# Altium PCB 2014_carte_alim.PcbDoc
Units mil, origin at the board's own origin, x right, y up, seen from the top; angles counter-clockwise.
Board outline 3228.35 x 1574.8 mil, 4 copper layers (1-TOP, 2-GND, 3-SIGNAL, 4-BOT); 35 components, 13 nets, 190 pads, 41 vias.
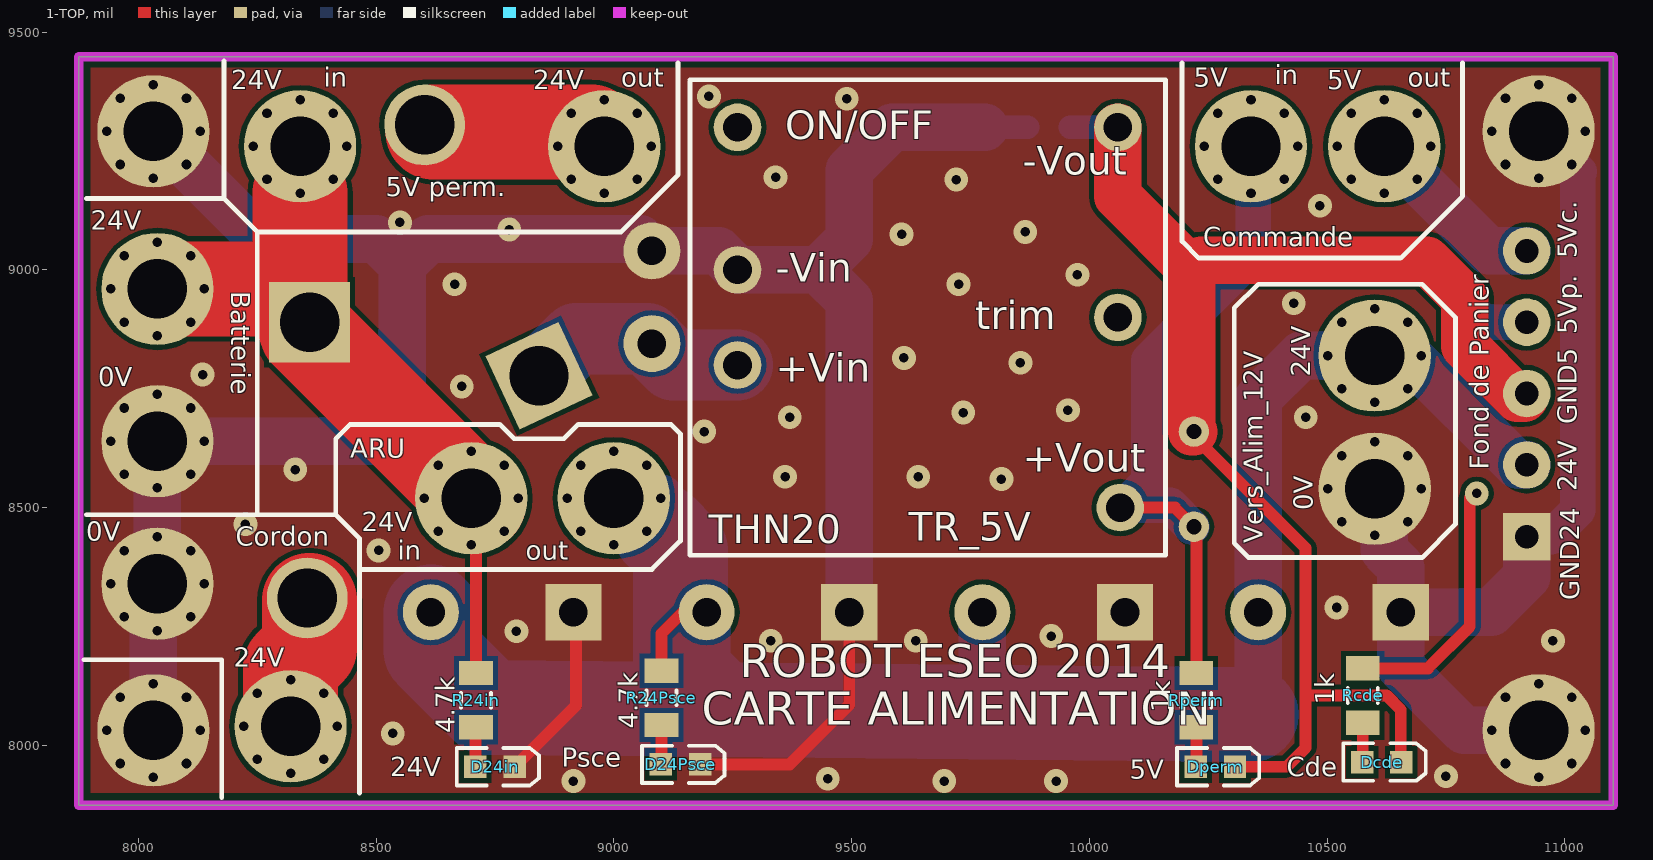
[diagram p0: 1-TOP view]
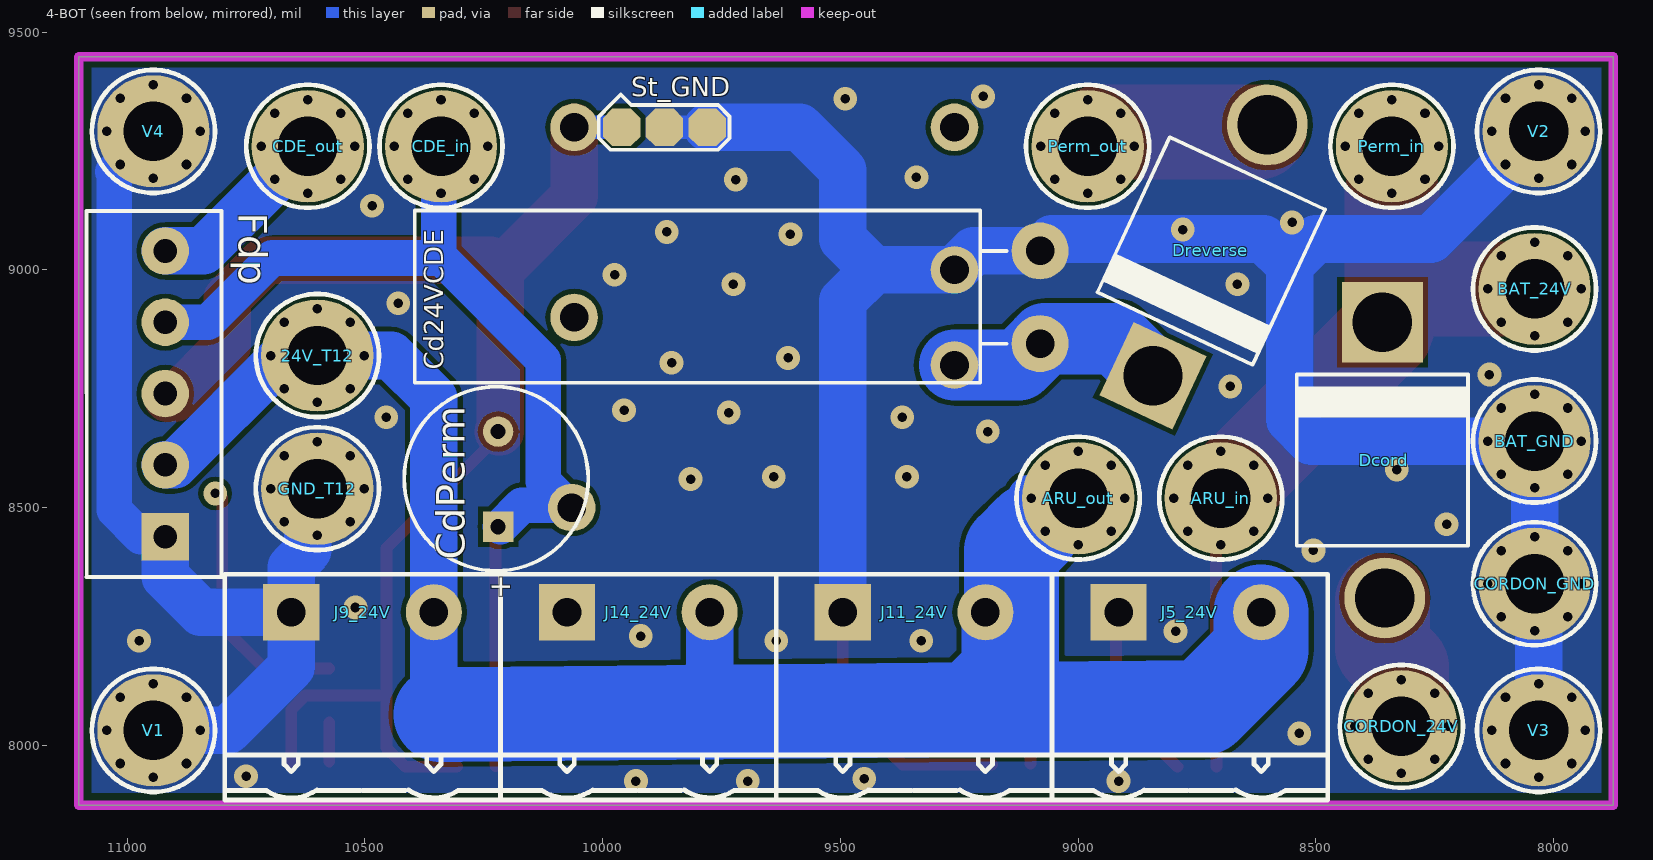
[diagram p1: 4-BOT view, seen from below]
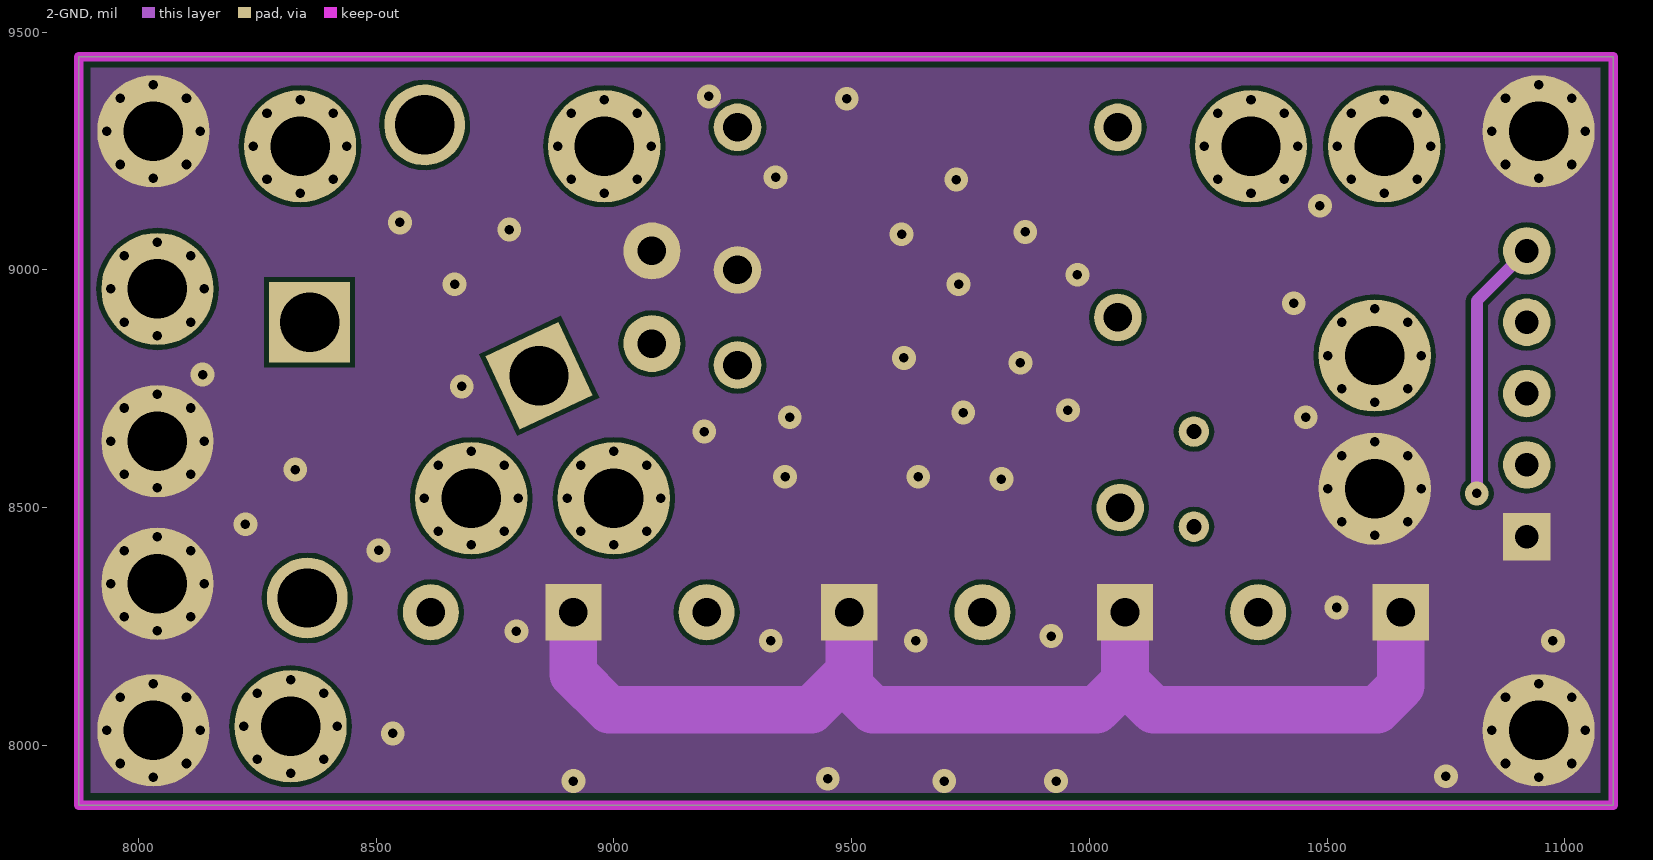
[diagram p2: 2-GND]
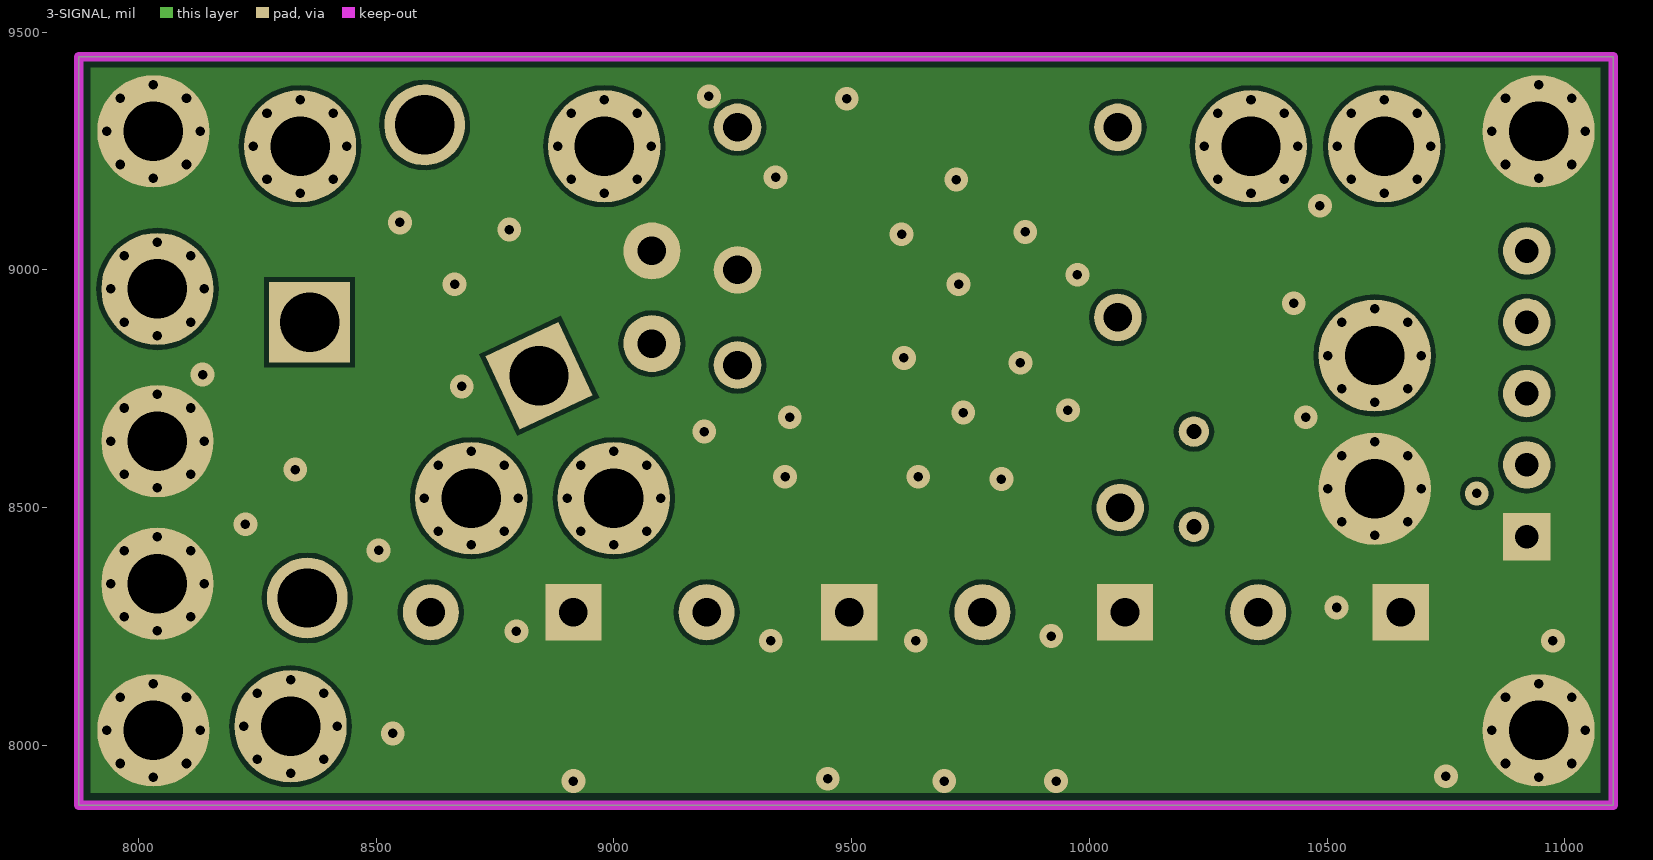
[diagram p3: 3-SIGNAL]
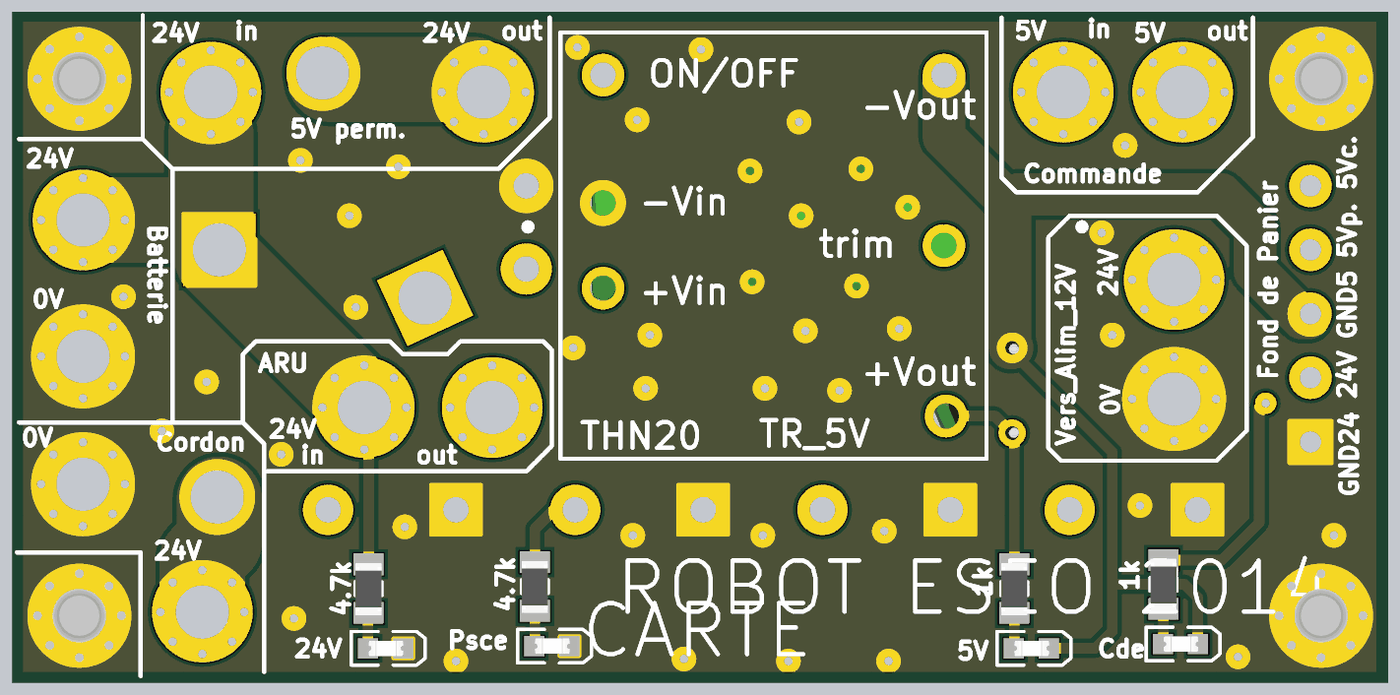
[diagram p4: 3D render of the assembled board from above, using the file's embedded part models]

## Layer stack, top to bottom
1-TOP: signal copper 1.4
Dielectric: core 12.6, FR-4, Dk 4.8
2-GND: signal copper 1.4
Dielectric: prepreg 12.6, FR-4, Dk 4.8
3-SIGNAL: signal copper 1.4
Dielectric: core 12.6, FR-4, Dk 4.8
4-BOT: signal copper 1.4

## Board outline
7874.02,7874.02 11102.36,7874.02 11102.36,9448.82 7874.02,9448.82

## Design rules (kind name [scope] priority, off if disabled: settings)
Clearance [All] p1: gap=10
FabricationTestpoint [(IsPad And (OnTopLayer Or OnBottomLayer))] p1: side=3 testpointundercomponent=TRUE minsize=40 maxsize=100 preferedsize=60 minholesize=0 maxholesize=40 preferedholesize=32 testpointgrid=1 allowsidetop=TRUE allowsidebottom=TRUE usegrid=TRUE gridtolerance=0.01
HoleSize [All] p1: absolutevalues=TRUE maxlimit=200 minlimit=1 maxpercent=80.000 minpercent=20.000
PlaneConnect [All] p1: planeconnectstyle=Direct reliefexpansion=20 reliefentries=4 reliefconductorwidth=10 reliefairgap=10
PolygonConnect [All] p1: connectstyle=Direct reliefconductorwidth=10 reliefentries=4 polygonreliefangle="90 Angle"
RoomDefinition 2014_carte_alim [InComponentClass('2014_carte_alim')] p1: confinementstyle=ConfineIn formatcopy=TRUE lockcomponents=FALSE outline 11870,7925 12895,7925 12895,9055 11870,9055
RoutingVias [All] p1: holewidth=28 width=50 viastyle="Through Hole" minholewidth=28 minwidth=50 maxholewidth=28 maxwidth=50
SilkscreenOverComponentPads [All] p1: minsilkscreentomaskgap=10
SolderMaskExpansion [All] p1: expansion=4
Width [All] p1: maxlimit=200 minlimit=10 preferedwidth=15
24 further rules are at their usual default settings.

## Components (designator, comment, footprint, x,y, rotation, side; value= is the part's Value field where it differs from the comment)
24V_T12 "Pad_M3" M3x6mm 10600,8820 r180 bottom
ARU_in "Pad_M3" M3x6mm 8700,8520 r180 bottom
ARU_out "Pad_M3" M3x6mm 9000,8520 r270 bottom
BAT_24V "Pad_M3" M3x6mm 8040,8960 r0 bottom
BAT_GND "Pad_M3" M3x6mm 8040,8640 r0 bottom
Cd24VCDE "1000uF" RESISTANCE_5W 9080,8940 r0 bottom
CDE_in "Pad_M3" M3x6mm 10340,9260 r180 bottom
CDE_out "Pad_M3" M3x6mm 10620,9260 r270 bottom
CdPerm "100uF" CONDENSATEUR_POLARISE_ELECTROLYTIQUE_RADIAL_5.08/8.9 10220,8460 r90 bottom
CORDON_24V "Pad_M3" M3x6mm 8320,8040 r0 bottom
CORDON_GND "Pad_M3" M3x6mm 8040,8340 r0 bottom
D24in "LED" LED_0805 8750,7955 r0 top
D24Psce "LED" LED_0805 9140,7960 r0 top
Dcde "LED" LED_0805 10615,7965 r0 top
Dcord "Diode" DIO10.46-5.3x2.8 8360,8600 r90 bottom
Dperm "LED" LED_0805 10265,7955 r0 top
Dreverse "Diode 1N4001" DIO10.46-5.3x2.8 8720,9040 r295 bottom (schematic designator Dcord)
Fdp "BORNIER_5V_3.81MM" BORNIER_5V_3.81MM 10920,8440 r90 bottom
GND_T12 "Pad_M3" M3x6mm 10600,8540 r180 bottom
J5_24V "0 - 24V" BORNIER2_FEM_COUDE 8915,8280 r180 bottom
J9_24V "0 - 24V" BORNIER2_FEM_COUDE 10655,8280 r180 bottom
J11_24V "0 - 24V" BORNIER2_FEM_COUDE 9495,8280 r180 bottom
J14_24V "0 - 24V" BORNIER2_FEM_COUDE 10075,8280 r180 bottom
Perm_in "Pad_M3" M3x6mm 8340,9260 r180 bottom
Perm_out "Pad_M3" M3x6mm 8980,9260 r180 bottom
R24in "4.7k" R1206_N 8710,8095 r270 top
R24Psce "4.7k" R1206_N 9100,8100 r270 top
Rcde "1k" R1206_N 10575,8105 r270 top
Rperm "1k" R1206_N 10225,8095 r270 top
St_GND "Goutte Strap_3" "Goutte Strap_3" 9960,9300 r180 bottom
TR_5V "TRACO THN 20-4811Wi" TRACO_THN20 9160,9400 r0 top
V1 "Pad_M3" M3x6mm 10944.88,8031.5 r180 bottom locked
V2 "Pad_M3" M3x6mm 8031.5,9291.34 r180 bottom locked
V3 "Pad_M3" M3x6mm 8031.5,8031.5 r180 bottom locked
V4 "Pad_M3" M3x6mm 10944.88,9291.34 r180 bottom locked

## Footprints (in the part's own frame and the unit in brackets; to place one, negate y for a bottom-side part, rotate by r counter-clockwise, add the part's x,y. Pads: shape width x height; smd on the part's side, far side on the other; paste and mask are expansions set on the pad)
BORNIER2_FEM_COUDE [mm] "Connector; Header; 2 Position; Right Angle; Female; Pin Spacing=5.08mm Green"
  rect 3x3 hole 1.524: 1(0,0)
  round 3 hole 1.524: 2(7.62,0)
  silkscreen extent -3.56,-10.03 11.18,2.03
BORNIER_5V_3.81MM [mil]
  rect 100x100 hole 50: 1(-1,0)
  round 100 hole 50: 2(150,0) 3(300,0) 4(450,0) 5(600,0)
  silkscreen extent -86,-118 684,166
CONDENSATEUR_POLARISE_ELECTROLYTIQUE_RADIAL_5.08/8.9 [mil] "CONDENSATEUR_POLARISE_ELECTROLYTIQUE_RADIAL ; DIAMETRE : 8.9mm ; ESPACEMENT BROCHES : 5.08mm"
  rect 64x64 / inner round 64 / far side round 64 hole 32: 1(0,0)
  round 64 hole 32: 2(200,0)
  silkscreen extent -93,-190 294,197, body extent -93,-188 291,196, height 485
DIO10.46-5.3x2.8 [mil] "Diode, Axial; Body 5.2 x 2.7 mm (LxDia. max), Lead Dia. 0.86 mm (max)"
  round 170 hole 125: 1(-290,-5)
  rect 170x170 hole 125: 2(290,0)
  silkscreen extent -180,-180 180,180
"Goutte Strap_3" [mm] "3 Pads CMS Goutte Strap"
  oct 2x2 smd: 1(0,0) 2(2.286,0) 3(4.572,0)
  silkscreen extent -1.22,-1.19 5.77,1.75
LED_0805 [mm] "SM LED; 2 Flat Leads"
  rect 1.2x1.2 smd: 1(-1.05,0) 2(1.05,0)
  silkscreen extent -2.05,-1 2.35,1, body extent -1.05,-0.64 1.06,0.64, height 1.2
M3x6mm [mm] "Vis M3 X 6mm _TORX_Tête 6mm"
  round 0.8 hole 0.508: 1(-2.5,0) 1(-1.768,-1.768) 1(-1.768,1.768) 1(0,-2.5) 1(0,2.5) 1(1.768,-1.768) 1(1.768,1.768) 1(2.5,0)
  round 6 hole 3.175: 1(0,0)
  silkscreen extent -3.29,-3.28 3.29,3.28
R1206_N [mm] "Chip Resistor, Body 3.2x1.6mm, IPC Medium Density"
  rect 1.3x1.8 smd: 1(-1.45,0) 2(1.45,0)
  silkscreen extent -0.4,-0.8 0.4,0.8, body extent -1.68,-0.87 1.68,0.87, height 0.71
RESISTANCE_5W [mil] "RESISTANCE 5W ; DIAMETRE : 8.5mm ; LONGUEUR : 26mm ; PAS : 2mm"
  round 120 hole 60: 1(0,95) 2(0,-100)
  silkscreen extent 70,-185 1315,177, body extent -12,-175 1320,167, height 368
TRACO_THN20 [mil] "THN20"
  round 100 hole 60: 1(100,-600) 2(100,-400) 3(905,-900) 4(900,-500) 5(900,-100) 6(100,-100)
  silkscreen extent 0,-1000 1000,0, body extent -2,-1001 1001,0, height 390

## Part data
24V_T12 ARU_in ARU_out BAT_24V BAT_GND CDE_in CDE_out CORDON_24V CORDON_GND GND_T12 Perm_in Perm_out V1 V2 V3 V4: library part "Vis M3 X 6mm _TORX_Tête 6mm", "Vis M3 X 6mm _TORX_Tête 6mm"
Cd24VCDE CdPerm: library part "Condensateur Polarise Traversant", "Polarized Capacitor"
D24in D24Psce Dcde Dperm: "Typical LED"
Dcord: library part "Diode 1N4001", "1 Amp General Purpose Rectifier"
Dreverse: "1 Amp General Purpose Rectifier"
J5_24V J9_24V J11_24V J14_24V: library part BORNIER2, "Terminal blocks, 2 pins, pitch=5mm"
R24in R24Psce Rcde Rperm: library part Resistor, "Resistor"
TR_5V: "Traco 20W 24V to 5V*4A"

## Via types
v1: diameter 50, hole 20, 1-TOP to 4-BOT, 41 vias

## Nets (pads, with @x,y where several pads share a name; then routed paths per layer and width w, separated by ;. In a path a pad name is that pad's centre, name@x,y a point inside that pad or via, vN(x,y) a via of type N, cw(c..) or ccw(c..) an arc to the next point about the centre after c; other vN are vias at no path point)
5VCDE: CDE_out.1 Fdp.5 Rcde.1 | length 1588.6
  1-TOP w25: Rcde.1 10712.09,8162.09 10800,8250 10800,8520 v1@10810,8530 ; CDE_out.1@10620,9260 CDE_out.1@10689.6,9190.4
  2-GND w25: v1(10815,8530) 10815,8935 Fdp.5
  4-BOT w100: CDE_out.1@10620,9260 10689.6,9190.4 10840,9040 Fdp.5
5VPERM: CDE_in.1 CdPerm.1 Fdp.4 Rperm.1 TR_5V.3 | length 2142.9
  1-TOP w25: TR_5V.3 10180,8500 CdPerm.1 10225,8455 Rperm.1
  2-GND w25: CDE_in.1@10340,9255 CDE_in.1@10340,9260
  4-BOT w25: CDE_in.1@10340,9260 CDE_in.1@10345,9255
  4-BOT w75: CdPerm.1@10215,8460 10170,8505 10075,8505 10125,8555 10125,8810 10340,9025 ; CDE_in.1@10345,9255 10345,9025 10695,9025 10830,8890 Fdp.4
24VCORDON: CORDON_24V.1 Dcord.1 | length 281.6
  1-TOP w200: CORDON_24V.1@8320,8040 8320,8165 8360,8205 Dcord.1@8360,8305
24VIN: ARU_in.1 BAT_24V.1 Dcord.2 Perm_in.1 R24in.1 | length 1543.9
  1-TOP w25: ARU_in.1@8700,8520 8700,8421.57 8710,8411.57 R24in.1
  1-TOP w100: BAT_24V.1@8030,8960 BAT_24V.1@8040,8960 ; Perm_in.1@8340,9161.57 Perm_in.1@8340,9260
  1-TOP w200: BAT_24V.1@8030,8960 Dcord.2@8290,8960 ; Perm_in.1@8340,9161.57 8340,8910 8355,8870 ARU_in.1@8715,8510
24VPERM: Dreverse.1 Perm_out.1 | length 396.6
  1-TOP w100: Perm_out.1@8935.06,9304.94 Perm_out.1@8980,9260
  1-TOP w200: Dreverse.1@8620,9290 Perm_out.1@8953.09,9290
24VPSCE: 24V_T12.1 ARU_out.1 Fdp.2 J5_24V.2 J9_24V.2 J11_24V.2 J14_24V.2 R24Psce.1 | length 4527.3
  1-TOP w25: R24Psce.1 9100,8235 9145,8280 J11_24V.2
  4-BOT w100: ARU_out.1@9000,8520 9098.43,8520 9098.43,8450.4 ; 9140,8120 9195,8175 ; J11_24V.2 9195,8175 ; 9290,8080 9195,8175 ; 9705,8080 9775,8150 ; J14_24V.2 9775,8150 ; 9865,8060 9855.47,8069.53 9775,8150 ; 10300,8060 10305.32,8065.32 10355,8115 J9_24V.2 10355,8730 10445,8820 24V_T12.1@10521.57,8820 ; 24V_T12.1@10620,8820 10670,8820 10900,8590 Fdp.2
  4-BOT w200: J5_24V.2 8615,8200 8735,8080 9098.05,8076.61 9855.47,8069.53 10305.32,8065.32 10340,8065 ; 9098.43,8450.4 9140,8408.83 9140,8120
GND_5: CdPerm.2 Dcde.2 Dperm.2 Fdp.3 St_GND.1 TR_5V.5 | length 2936.2
  1-TOP w25: CdPerm.2 10220,8650 10455,8415 10455,8105 ; Dperm.2 10415,7955 10455,7995 10455,8105 ; Dcde.2@10655,7965 10655,8075 10625,8105 10455,8105
  1-TOP w100: TR_5V.5 10060,9155 10215,9000 ; CdPerm.2 10215,8660 10215,9000 ; Fdp.3@10915,8730 10900,8730 10790,8840 10790,8940 10710,9020 10235,9020 10215,9000
  4-BOT w50: St_GND.1 TR_5V.5@10050,9300
GND_24: BAT_GND.1 Cd24VCDE.2 CORDON_GND.1 D24in.2 D24Psce.2 Fdp.1 GND_T12.1 J5_24V.1 J9_24V.1 J11_24V.1 J14_24V.1 St_GND.2 St_GND.3 TR_5V.2 V1.1 V2.1 V3.1 V4.1 | length 9758.3
  1-TOP w25: D24in.2 8920,8083.66 8920,8275 J5_24V.1 ; D24Psce.2 9370,7960 9495,8085 J11_24V.1
  2-GND w100: J5_24V.1 8915,8150 8990,8075 9415,8075 9495,8155 ; J11_24V.1 9495,8155 ; J14_24V.1 10075,8135 ; J9_24V.1 10655,8125 10605,8075 10135,8075 10075,8135 ; 9495,8155 9495,8125 9545,8075 10015,8075 10075,8135
  4-BOT w50: St_GND.3 St_GND.2 ; V4.1@10944.88,9291.34 V4.1@11014.48,9221.74
  4-BOT w75: Fdp.1 10971.36,8439 11027.5,8495.14 V4.1@11027.5,9208.72 ; V4.1@11014.48,9221.74 V4.1@11027.5,9208.72 ; 11030,9206.22 V4.1@11027.5,9208.72
  4-BOT w100: V3.1@8031.5,8031.5 8031.5,8129.92 CORDON_GND.1@8031.5,8241.57 ; V2.1@8031.5,9291.34 8101.09,9221.74 8257.83,9065 8500,9065 8555,9010 ; CORDON_GND.1@8040,8340 8040,8438.43 BAT_GND.1@8040,8541.57 ; BAT_GND.1@8040,8640 8138.43,8640 8510,8640 8555,8685 8555,9010 ; 9400,9000 TR_5V.2 ; J11_24V.1 9495,8935 9430,9000 ; St_GND.3 9585,9300 9495,9210 9495,9065 9430,9000 ; GND_T12.1@10620,8540 10620,8441.57 10620,8410 10655,8375 J9_24V.1 10845,8280 10920,8355 Fdp.1 ; J9_24V.1@10655,8265 10655,8165 10788.5,8031.5 V1.1@10846.46,8031.5 ; 8555,9010 8610,9065 9055,9065 Cd24VCDE.2 9220,9040 TR_5V.2 ; TR_5V.2 9430,9000
  other v1: 8915,7925 9695,7925 9930,7925 9450,7930 10750,7935 8535,8025 9330,8220 9635,8220 10975,8220 9920,8230 8795,8240 10520,8290 8505,8410 8225,8465 9815,8560 9360,8565 9640,8565 8330,8580 9190,8660 9370,8690 10455,8690 9735,8700 9955,8705 8680,8755 8135,8780 9855,8805 9610,8815 10430,8930 8665,8970 9725,8970 9975,8990 9605,9075 9865,9080 8780,9085 8550,9100 10485,9135 9720,9190 9340,9195 9490,9360 9200,9365
NetCd24VCDE_1: Cd24VCDE.1 Dreverse.2 TR_5V.1 | length 472.5
  4-BOT w150: Dreverse.2 8920.39,8855 9070,8855 Cd24VCDE.1 9125,8800 TR_5V.1
NetD24in_1: D24in.1 R24in.2 | length 83.5
  1-TOP w25: D24in.1 8708.66,8036.58 R24in.2
NetD24Psce_1: D24Psce.1 R24Psce.2 | length 81.6
  1-TOP w25: D24Psce.1@9100,7961.34 R24Psce.2
NetDcde_1: Dcde.1 Rcde.2 | length 81.6
  1-TOP w25: Dcde.1@10575,7966.34 Rcde.2
NetDperm_1: Dperm.1 Rperm.2 | length 81.6
  1-TOP w25: Dperm.1@10225,7956.34 Rperm.2
pads on no net: TR_5V.4 TR_5V.6

## Polygon pours and split planes (outlines as drawn)
GND_24 on 4-BOT "4-GND24" (solid, pour order 1006): 7900,9425 11075,9425 11075,7900 7900,7900
GND_24 on 3-SIGNAL "3-GND24" (solid, pour order 1006): 7900,9425 11075,9425 11075,7900 7900,7900
GND_24 on 2-GND "2-GND24" (solid, pour order 1006): 7900,9425 11075,9425 11075,7900 7900,7900
GND_24 on 1-TOP "1-GND24" (solid, pour order 1006): 7900,9425 11075,9425 11075,7900 7900,7900

## Keep-outs
Keep-Out Layer:
  the board outline again, w20

## Silkscreen, mask and mechanical layers (free items; w line width, h text height)
Top Overlay:
  lines w10: 7885,8180 8175,8180 8175,7890 ; 7890,8485 8165,8485 8415,8485 ; 7890,9150 8180,9150 ; 8180,9440 8180,9150 ; 8250,8490 8250,9080 ; 8465,7900 8465,8170 8465,8435 8415,8485 ; 8465,8370 9080,8370 9140,8430 9140,8655 9120,8675 8925,8675 8895,8645 8790,8645 8760,8675 8445,8675 8415,8645 8415,8485 ; 9135,9435 9135,9200 9015,9080 8250,9080 ; 10195,9435 10195,9060 10230,9025 10655,9025 10785,9155 10785,9435 ; 8180,9150 8250,9080 ; 10305,8425 10305,8920 10355,8970 10700,8970 10770,8900 10770,8465 10700,8395 10335,8395 10305,8425
  text "in" at 10390,9390 h40
  text "in" at 8390,9385 h40
  text "out" at 9015,9385 h40
  text "5V" at 10220,9385 h40
  text "out" at 10670,9385 h40
  text "24V" at 8195,9380 h40
  text "24V" at 8830,9380 h40
  text "5V" at 10500,9380 h40
  text "5V perm." at 8520,9155 h40
  text "24V" at 7900,9085 h40
  text "Commande" at 10240,9050 h40
  text "5Vc." at 11025,9025 h40 r90
  text "Batterie" at 8195,8955 h40 r270
  text "5Vp." at 11025,8865 h40 r90
  text "24V" at 10465,8775 h40 r90
  text "0V" at 7915,8755 h40
  text "GND5" at 11025,8675 h40 r90
  text "ARU" at 8445,8605 h40
  text "Fond de Panier" at 10840,8580 h40 r90
  text "24V" at 11025,8535 h40 r90
  text "0V" at 10470,8495 h40 r90
  text "24V" at 8470,8450 h40
  text "0V" at 7890,8430 h40
  text "Vers_Alim_12V" at 10365,8425 h40 r90
  text "Cordon" at 8205,8420 h40
  text "in" at 8545,8390 h40
  text "out" at 8815,8390 h40
  text "GND24" at 11030,8305 h40 r90
  text "24V" at 8200,8165 h40
  text "ROBOT ESEO 2014" at 9265,8120 h120
  text "1k" at 10515,8085 h40 r90
  text "1k" at 10170,8070 h40 r90
  text "4.7k" at 9050,8035 h40 r90
  text "4.7k" at 8665,8025 h40 r90
  text "CARTE ALIMENTATION" at 9185,8020 h120
  text "Psce" at 8890,7955 h40
  text "24V" at 8530,7935 h40
  text "Cde" at 10415,7935 h40
  text "5V" at 10085,7930 h40

## Dimensions
8031.5,8031.5 to 7874.02,7874.02 on Mechanical 15
8031.5,8031.5 to 7874.02,7874.02 on Mechanical 15
8031.5,8031.5 to 8295.97,7767.02 on Mechanical 15
11102.36,7874.02 to 7874.02,7874.02 on Mechanical 15
11102.36,9448.82 to 11102.36,7874.02 on Mechanical 15

## Text inside footprints (layer, text, board x,y; h text height)
CdPerm: Bottom Overlay "+" at 10194.8,8307.24 h45 r270
TR_5V: Top Overlay "trim" at 9760,8875 h60; Top Overlay "ON/OFF" at 9360,9275 h60; Top Overlay "THN20" at 9200,8425 h60; Top Overlay "-Vin" at 9340,8975 h60; Top Overlay "+Vin" at 9340,8765 h60; Top Overlay "-Vout" at 9860,9200 h60; Top Overlay "+Vout" at 9860,8575 h60